# EAGLE board EDW-project - final (EAGLE 9.6.2)
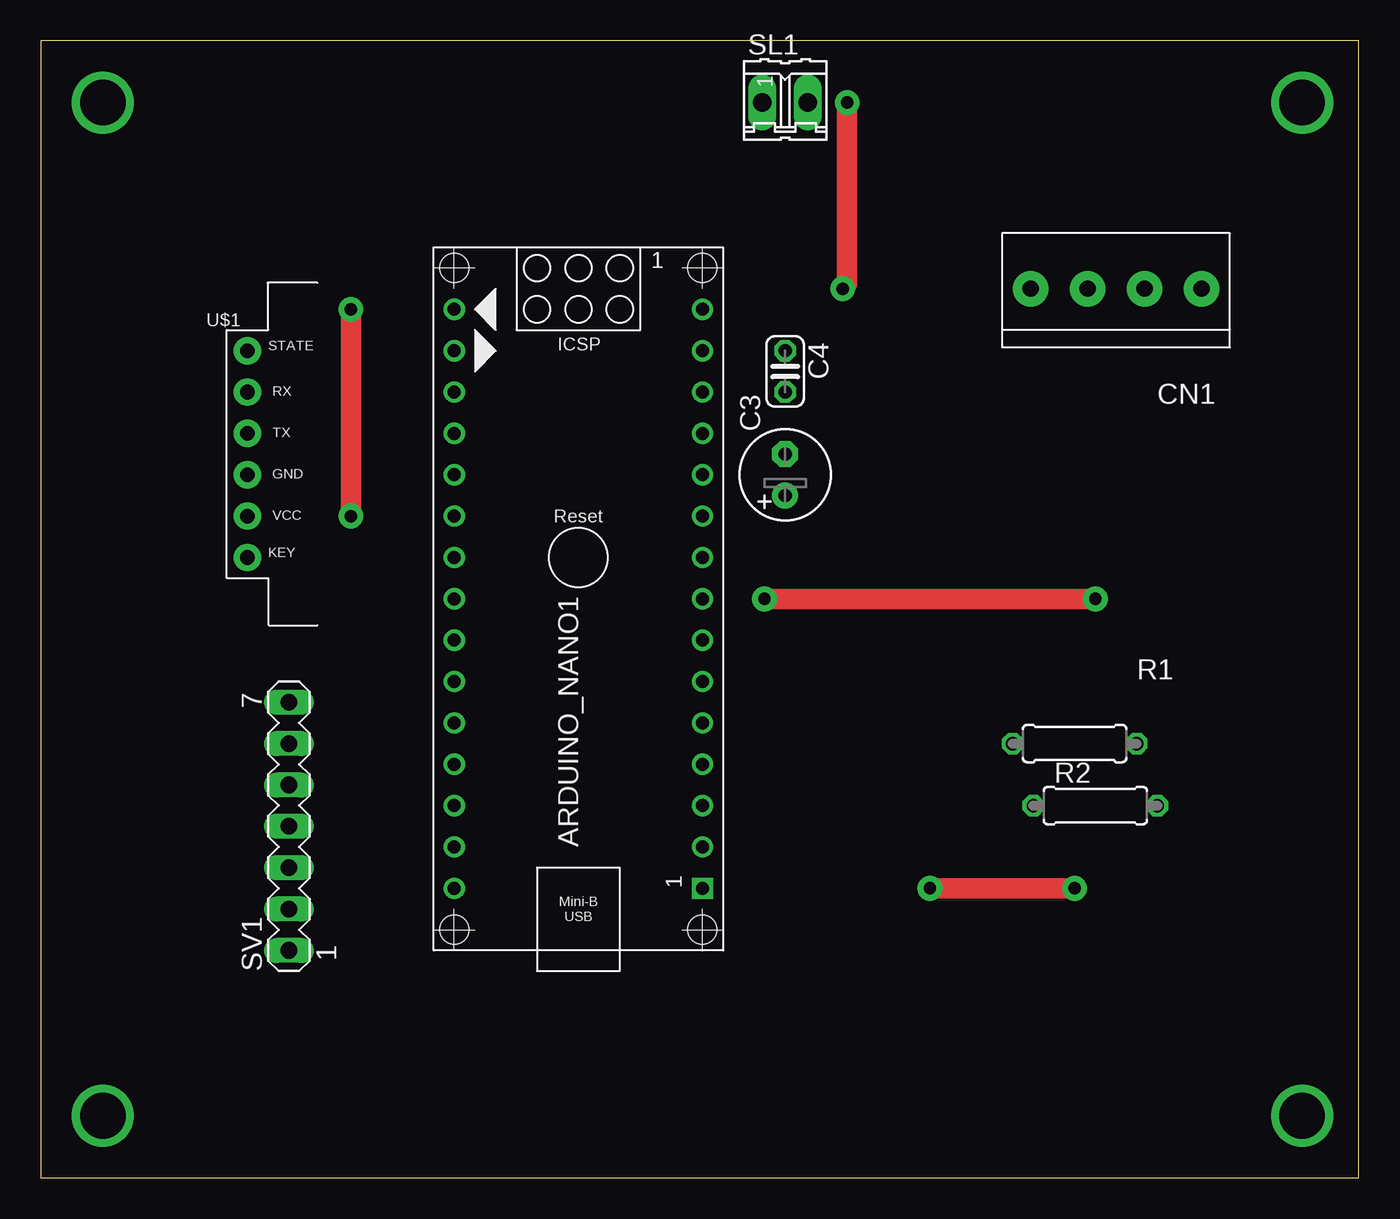
[diagram p0: board, top side]
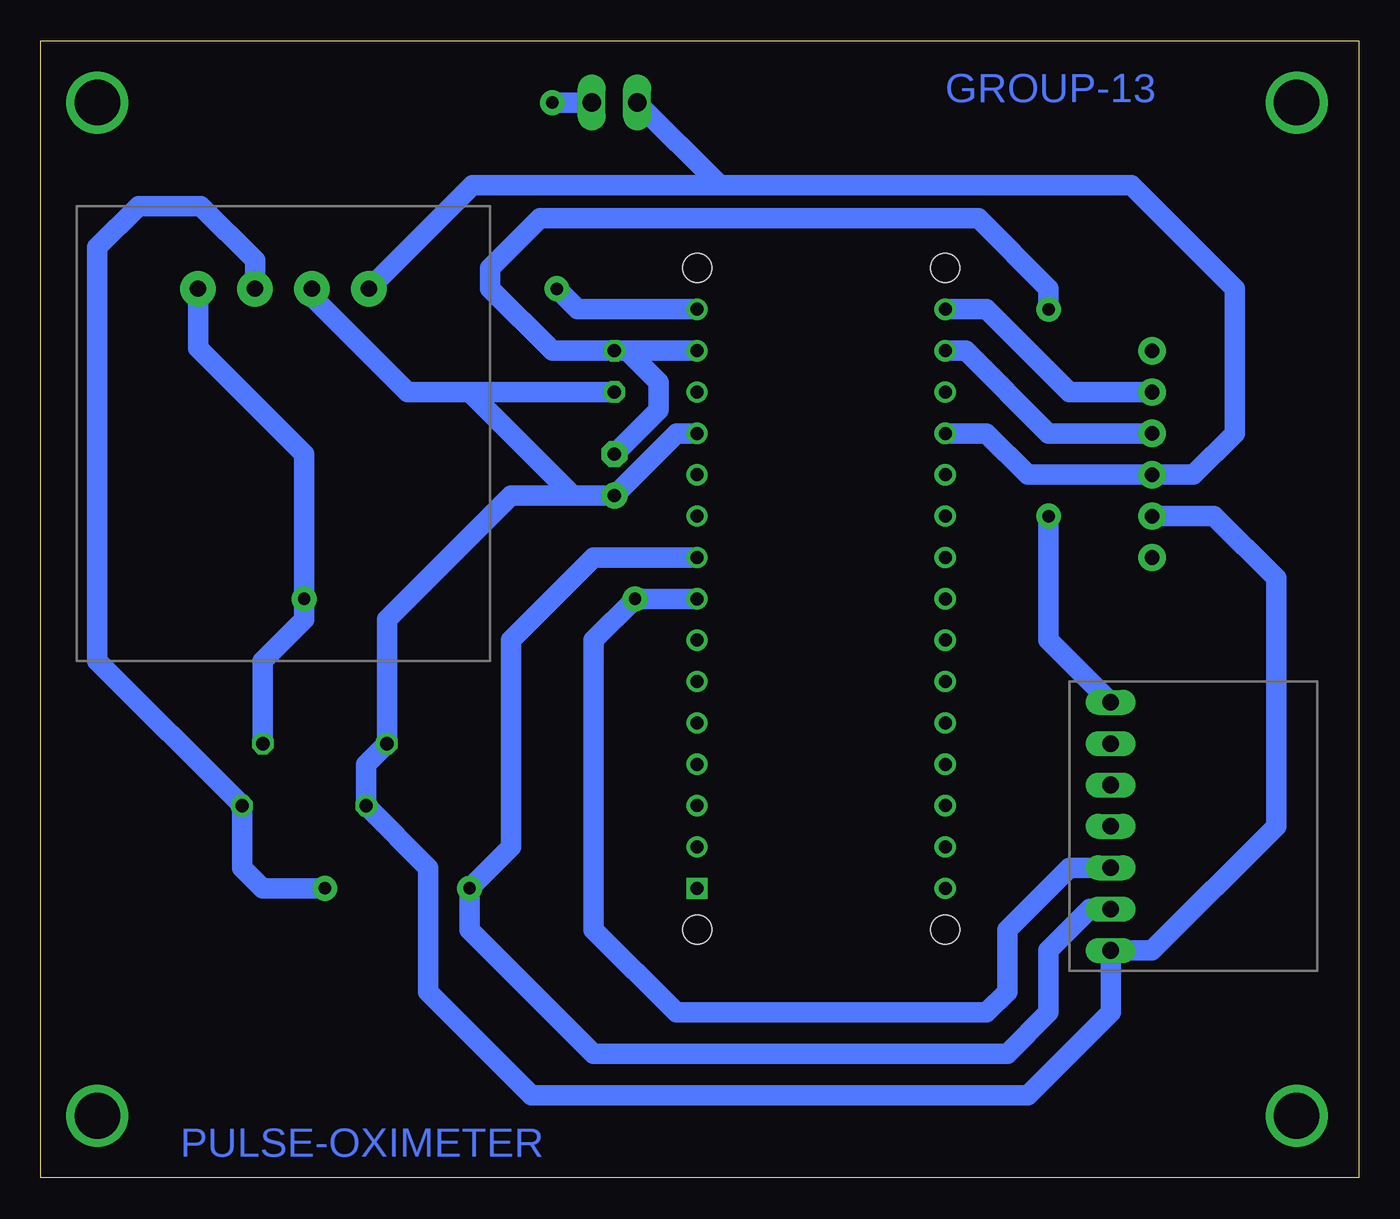
[diagram p1: board, bottom side, seen from below]

Size 80.95 x 69.84 mm. Coordinates in mm from the lower left corner, seen from the top.
Outline: 0,0 80.95,0 80.95,69.84 0,69.84 0,0
Copper layers (1*16): Top 0.035mm / dielectric 1.5mm / Bottom 0.035mm
Design rules "default": minimum track width 6mil, minimum drill 0.35mm, track to track 6mil, track to pad 6mil, pad to pad 6mil, via to via 6mil, smd to smd 6mil, copper to edge 40mil, drill to drill 6mil, minimum pad ring 10mil, minimum via ring 8mil, stop-mask expansion 4mil, vias tented up to drill 0mil, thermal gap 10mil

## Footprints (pad centres in the part's own frame; a part is rotated, then mirrored left to right if it is on the bottom)
ARDUINO_NANO = drill 0.8 square: 1 -20.32,-7.62 | drill 0.8: 2 -17.78,-7.62; 3 -15.24,-7.62; 4 -12.7,-7.62; 5 -10.16,-7.62; 6 -7.62,-7.62; 7 -5.08,-7.62; 8 -2.54,-7.62; 9 0,-7.62; 10 2.54,-7.62; 11 5.08,-7.62; 12 7.62,-7.62; 13 10.16,-7.62; 14 12.7,-7.62; 15 15.24,-7.62; 16 15.24,7.62; 17 12.7,7.62; 18 10.16,7.62; 19 7.62,7.62; 20 5.08,7.62; 21 2.54,7.62; 22 0,7.62; 23 -2.54,7.62; 24 -5.08,7.62; 25 -7.62,7.62; 26 -10.16,7.62; 27 -12.7,7.62; 28 -15.24,7.62; 29 -17.78,7.62; 30 -20.32,7.62 | hole 1.778: -22.86,-7.62; -22.86,7.62; 17.78,7.62; 17.78,-7.62
E2,5-6 = drill 0.813 pad 1.6: + -1.27,0 | drill 0.813 pad 1.6 octagon: - 1.27,0
C025-024X044 = drill 0.813 octagon: 1 -1.27,0; 2 1.27,0
1X04-3.5MM = drill 1 pad 2.184: 1 -5.25,0; 2 -1.75,0; 3 1.75,0; 4 5.25,0
0207/7 = drill 0.813 octagon: 1 -3.81,0; 2 3.81,0
02P = drill 1.143 long: 1 -1.397,0; 2 1.397,0
MA07-1 = drill 1.016 long: 1 -7.62,0; 2 -5.08,0; 3 -2.54,0; 4 0,0; 5 2.54,0; 6 5.08,0; 7 7.62,0
HC-05(STANDING) = drill 0.9 pad 1.676: GND -3.81,-1.27; KEY -3.81,-6.35; RX -3.81,3.81; STATE -3.81,6.35; TX -3.81,1.27; VCC -3.81,-3.81

## Placement (x,y rotation side)
ARDUINO_NANO1  [ARDUINO_NANO]  33.02,38.1 90 top
C3  [E2,5-6]  45.72,43.18 90 top
C4  [C025-024X044]  45.72,49.53 270 top
CN1  1X4-3.5MM  [1X04-3.5MM]  66.04,54.61 0 top
R1  10k  [0207/7]  63.5,26.67 0 top
R2  10k  [0207/7]  64.77,22.86 0 top
SL1  [02P]  45.72,66.04 0 top
SV1  [MA07-1]  15.24,21.59 90 top
U$1  HC-05(BLUETOOTH_MODULE)STANDING  [HC-05(STANDING)]  16.51,44.45 0 top

## Library data of the parts
ARDUINO_NANO1 = ArduinoNanoV30
C3 C4 = rcl; SPICEPREFIX: C
CN1 = adafruit
R1 R2 SL1 U$1 = CEDT_2022_v1
SV1 = con-lstb; OC_FARNELL: unknown; OC_NEWARK: unknown

## Nets
N$2: ARDUINO_NANO1.8 CN1.4 R1.2 SV1.3
N$5: ARDUINO_NANO1.15 SL1.2
N$8: ARDUINO_NANO1.16 U$1.RX
N$9: ARDUINO_NANO1.17 U$1.TX
N$10: ARDUINO_NANO1.19 CN1.1 SL1.1 U$1.GND
N$11: ARDUINO_NANO1.14 C3.- C4.1 SV1.7
N$12: ARDUINO_NANO1.12 C3.+ C4.2 CN1.2 R1.1 R2.1 SV1.1 U$1.VCC
N$13: ARDUINO_NANO1.9 CN1.3 R2.2 SV1.2

## Tracks (layer width: path | path; a pad name or v marks a point on that pad's centre or on a via)
N$1  (via drill 2.79 pad 3.3)
  other vias: 3.81,66.04
N$2  (via drill 0.76 pad 1.52)
  Top 1.27: v64.77,35.56 v44.45,35.56
  Bottom 1.27: SV1.3 17.78,19.05 21.59,15.24 21.59,11.43 22.86,10.16 41.91,10.16 46.99,15.24 46.99,33.02 v44.45,35.56 ARDUINO_NANO1.8 | R1.2 67.31,31.75 64.77,34.29 v64.77,35.56 64.77,44.45 71.29,50.97 CN1.4
N$3  (via drill 2.79 pad 3.3)
  other vias: 3.81,3.81
N$5  (via drill 0.76 pad 1.52)
  Top 1.27: v49.53,66.04 49.53,54.89 v49.25,54.61
  Bottom 1.27: SL1.2 v49.53,66.04 | v49.25,54.61 47.98,53.34 ARDUINO_NANO1.15
N$6  (via drill 2.79 pad 3.3)
  other vias: 77.47,3.81
N$7  (via drill 2.79 pad 3.3)
  other vias: 77.47,66.04
N$8
  Bottom 1.27: ARDUINO_NANO1.16 22.86,53.34 17.78,48.26 U$1.RX
N$9
  Bottom 1.27: U$1.TX 19.05,45.72 24.13,50.8 ARDUINO_NANO1.17
N$10
  Bottom 1.27: CN1.1 54.44,60.96 39.24,60.96 | ARDUINO_NANO1.19 22.86,45.72 20.32,43.18 U$1.GND 10.16,43.18 7.62,45.72 7.62,54.61 13.97,60.96 36.83,60.96 39.24,60.96 | SL1.1 39.24,60.96
N$11  (via drill 0.76 pad 1.52)
  Top 1.27: v19.05,40.64 v19.05,53.34
  Bottom 1.27: SV1.7 19.05,33.02 v19.05,40.64 | v19.05,53.34 19.05,54.61 23.37,58.93 50.29,58.93 53.34,55.88 53.34,54.61 49.53,50.8 C4.1 | ARDUINO_NANO1.14 C4.1 | C4.1 44.94,50.8 43,48.86 43,47.17 C3.-
N$12
  Bottom 1.27: CN1.2 64.29,54.13 58.42,48.26 54.61,48.26 | U$1.VCC 8.89,40.64 5.08,36.83 5.08,21.59 12.7,13.97 SV1.1 15.24,10.16 20.32,5.08 50.8,5.08 57.15,11.43 57.15,19.05 R2.1 60.96,25.4 R1.1 59.69,34.29 52.07,41.91 C3.+ | C4.2 54.61,48.26 | C3.+ 48.26,41.91 54.61,48.26 | ARDUINO_NANO1.12 41.91,45.72 C3.+
N$13  (via drill 0.76 pad 1.52)
  Top 1.27: v63.5,17.78 v54.61,17.78
  Bottom 1.27: SV1.2 16.51,16.51 19.05,13.97 19.05,10.16 21.59,7.62 46.99,7.62 54.61,15.24 v54.61,17.78 52.07,20.32 52.07,33.02 46.99,38.1 ARDUINO_NANO1.9 | CN1.3 67.79,56.36 71.12,59.69 74.93,59.69 77.47,57.15 77.47,31.75 R2.2 68.58,19.05 67.31,17.78 v63.5,17.78

## Text on the board
Bottom: GROUP-13 | PULSE-OXIMETER